# Altium PCB main_board.PcbDoc
Units mil, origin at the board's own origin, x right, y up, seen from the top; angles counter-clockwise.
Board outline 6000 x 4000 mil, 2 copper layers (Top Layer, Bottom Layer); 19 components, 43 nets, 145 pads, 0 vias.
Unrouted connection lines stored in the file: 58.
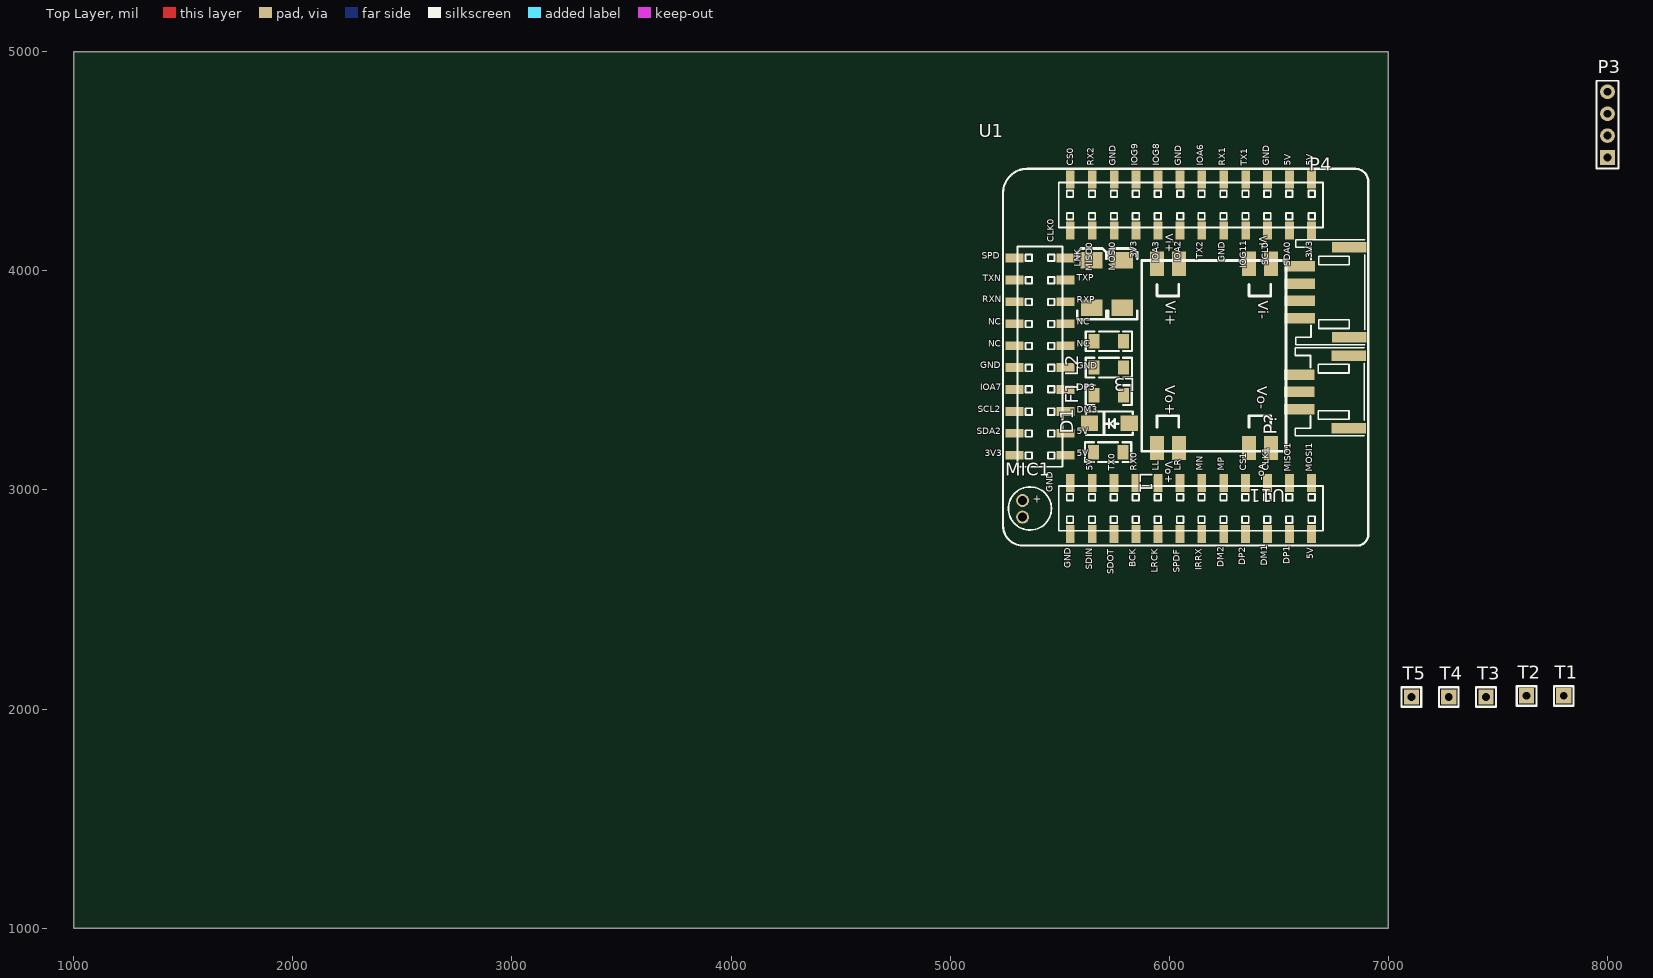
[diagram p0: Top Layer view]
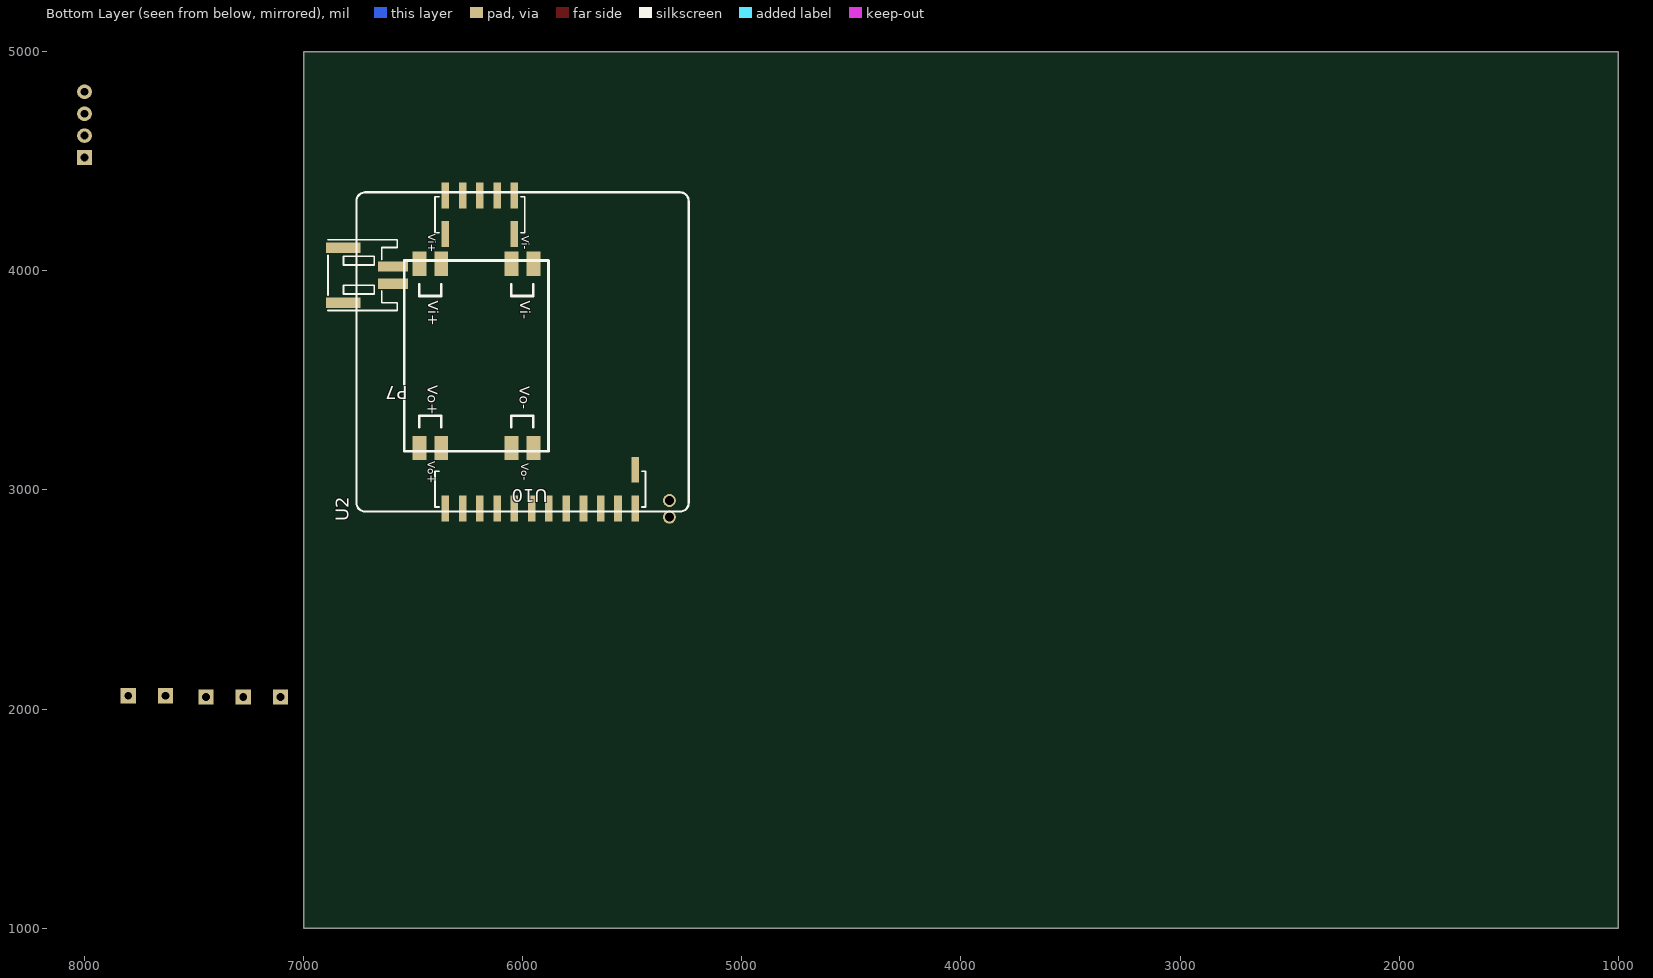
[diagram p1: Bottom Layer view, seen from below]

## Layer stack, top to bottom
Top Solder: solder mask 0.4, Solder Resist, Dk 3.5
Top Layer: signal copper 1.4
Dielectric 1: dielectric 12.6, FR-4, Dk 4.8
Bottom Layer: signal copper 1.4
Bottom Solder: solder mask 0.4, Solder Resist, Dk 3.5

## Board outline
1000,1000 7000,1000 7000,5000 1000,5000

## Design rules (kind name [scope] priority, off if disabled: settings)
Clearance [All] p1: gap=10
PolygonConnect [All] p1: connectstyle=Relief reliefconductorwidth=10 reliefentries=4 polygonreliefangle="90 Angle" airgapwidth=10
RoutingVias [All] p1: holewidth=28 width=50 viastyle="Through Hole" minholewidth=28 minwidth=50 maxholewidth=28 maxwidth=50
SolderMaskExpansion [All] p1: expansion=4
Width [All] p1: maxlimit=10 minlimit=10 preferedwidth=10
30 further rules are at their usual default settings.

## Classes and differential pairs
component class devices: L2 L3 MIC1 P3 P4 P7 P? T1 T2 T3 T4 T5 U10 U11
component class core: D1 F1 L1 U1 U2

## Components (designator, comment, footprint, x,y, rotation, side; value= is the part's Value field where it differs from the comment)
D1 "SS14" SMA/DO-214AC 5810,3305 r180 top
F1 "保险丝" FUSE-1206 5790,3430 r180 top
L1 "10uH" 1206L 5655,3170 r0 top
L2 "磁珠" 1206L 5790,3560 r180 top
L3 "磁珠" 1206L 5790,3680 r180 top
MIC1 "MIC" MIC 5365,2915 r0 top
P3 "Debug" "Header 4(排母)" 8000,4515 r90 top
P4 "USB1" PH2.0WS-4P 6750,3895 r90 top
P7 "电力接口" PH2.0WS-2P 6735,3980 r270 bottom
P? "3PIN" PH2.0WS-3P 6730,3450 r90 top
T1 "24V" "HEADER 1" 7805,2060 r0 top
T2 "12V" "HEADER 1" 7635,2060 r0 top
T3 "5V" "HEADER 1" 7450,2055 r0 top
T4 "3.3V" "HEADER 1" 7280,2055 r0 top
T5 "GND" "HEADER 1" 7110,2055 r0 top
U1 "NanoPi NEO Core" "NanoPi NEO Core" 5905,4595 r90 top locked
U2 "电力载波模块" 电力载波模块6410(贴片版) 6030,3645 r90 bottom
U10 "MP1584模块" MP1584电源模块 6050,3975 r270 bottom
U11 "MP1584模块" MP1584电源模块 6365,3975 r270 top

## Footprints (in the part's own frame and the unit in brackets; to place one, negate y for a bottom-side part, rotate by r counter-clockwise, add the part's x,y. Pads: shape width x height; smd on the part's side, far side on the other; paste and mask are expansions set on the pad)
1206L [mil]
  rect 50x65 smd: 1(-1.59,1.89) 2(133.41,1.89)
  silkscreen extent -39,-43 171,47, body extent 3,-28 129,35, height 35
FUSE-1206 [mil]
  rect 50x65 smd: 1(-1,-2) 2(134,-2)
  silkscreen extent -39,-47 172,43, body extent 1,-36 127,28, height 34
"HEADER 1" [mil]
  rect 70x70 hole 35: 1(-5,0)
  silkscreen extent -50,-45 40,44
"Header 4(排母)" [mm]
  rect 1.7x1.7 hole 0.9: 1(0.035,0.015)
  round 1.7 hole 0.9: 2(2.575,0.015) 3(5.115,0.015) 4(7.655,0.015)
  silkscreen extent -1.23,-1.25 8.93,1.29, body extent -1.23,-1.25 8.93,1.29, height 8.5
MIC [mm]
  round 1.5 hole 1.016: 1(-0.875,0.925) 2(-0.875,-1)
  silkscreen extent -2.52,-2.5 2.47,2.5, body extent -3.1,-2.97 2.9,3.02, height 2.21
MP1584电源模块 [mm]
  rect 2.8x1.6 smd: 1(-1.441,-0.032) 1(-1.441,2.519) 2(-1.441,-10.7) 2(-1.441,-8.16) 3(19.901,-10.7) 3(19.901,-8.16) 4(19.901,-0.032) 4(19.901,2.508)
  silkscreen extent -1.82,-12.45 20.28,4.26, body extent -1.97,-12.42 20.3,4.18, height 4.65
"NanoPi NEO Core" [mm]
  rect 2.1x1.02 smd: 1(-45.612,-18.878) 2(-39.712,-18.878) 3(-45.612,-16.338) 4(-39.712,-16.338) 5(-45.612,-13.798) 6(-39.712,-13.798) 7(-45.612,-11.258) 8(-39.712,-11.258) 9(-45.612,-8.718) 10(-39.712,-8.718) 11(-45.612,-6.178) 12(-39.712,-6.178) 13(-45.612,-3.638) 14(-39.712,-3.638) 15(-45.612,-1.098) 16(-39.712,-1.098) 17(-45.612,1.442) 18(-39.712,1.442) 19(-45.612,3.982) 20(-39.712,3.982) 21(-45.612,6.522) 22(-39.712,6.522) 23(-45.612,9.062) 24(-39.712,9.062) 25(-10.45,-18.883) 26(-4.55,-18.883) 27(-10.45,-16.343) 28(-4.55,-16.343) 29(-10.45,-13.803) 30(-4.55,-13.803) 31(-10.45,-11.263) 32(-4.55,-11.263) 33(-10.45,-8.723) 34(-4.55,-8.723) 35(-10.45,-6.183) 36(-4.55,-6.183) 37(-10.45,-3.643) 38(-4.55,-3.643) 39(-10.45,-1.103) 40(-4.55,-1.103) 41(-10.45,1.437) 42(-4.55,1.437) 43(-10.45,3.977) 44(-4.55,3.977) 45(-10.45,6.517) 46(-4.55,6.517) 47(-10.45,9.057) 48(-4.55,9.057)
  rect 1.02x2.1 smd: 49(-13.641,9.625) 50(-13.641,15.525) 51(-16.181,9.625) 52(-16.181,15.525) 53(-18.721,9.625) 54(-18.721,15.525) 55(-21.261,9.625) 56(-21.261,15.525) 57(-23.801,9.625) 58(-23.801,15.525) 59(-26.341,9.625) 60(-26.341,15.525) 61(-28.881,9.625) 62(-28.881,15.525) 63(-31.421,9.625) 64(-31.421,15.525) 65(-33.961,9.625) 66(-33.961,15.525) 67(-36.501,9.625) 68(-36.501,15.525)
  silkscreen extent -46.97,-25.48 -3.3,16.85, body extent -45.96,-20.21 -4.4,15.67, height 5.15
PH2.0WS-2P [mm]
  rect 1.2x4 smd: 0(-3.189,-2.112) 0(3.211,-2.112)
  rect 1.2x3.5 smd: 1(-0.989,3.638) 2(1.011,3.638)
  silkscreen extent -4.09,-3.88 4.11,4.12, body extent -3.97,-3.47 4.03,4.33, height 6.15
PH2.0WS-3P [mm]
  rect 1.2x4 smd: 0(-4.271,-2.279) 0(4.129,-2.279)
  rect 1.2x3.5 smd: 1(-2.071,3.471) 2(-0.071,3.471) 3(1.929,3.471)
  silkscreen extent -5.17,-4.05 5.02,3.95, body extent -5.17,-3.51 4.83,4.29, height 6.15
PH2.0WS-4P [mm]
  rect 1.2x4 smd: 0(-5.033,-1.822) 0(5.367,-1.822)
  rect 1.2x3.5 smd: 1(-2.833,3.928) 2(-0.833,3.928) 3(1.167,3.928) 4(3.167,3.928)
  silkscreen extent -5.93,-3.59 6.26,4.41, body extent -5.91,-3.06 6.09,4.74, height 6.15
SMA/DO-214AC [mm]
  rect 2x1.75 smd: 1(-0.178,0.025) 2(4.422,0.025)
  silkscreen extent -0.58,-1.32 4.82,1.38, body extent -0.38,-1.32 4.73,1.35, height 2.12
电力载波模块6410(贴片版) [mm]
  rect 3x0.89 smd: 0(-14.05,-13.8) 0(13.25,0.2) 0(13.25,8.2) 0(17.75,2.2) 1(-18.55,8.2) 2(-18.55,6.2) 3(-18.55,4.2) 4(-18.55,2.2) 5(-18.55,0.2) 6(-18.55,-1.8) 7(-18.55,-3.8) 8(-18.55,-5.8) 9(-18.55,-7.8) 10(-18.55,-9.8) 11(-18.55,-11.8) 12(-18.55,-13.8) 13(17.75,0.2) 14(17.75,4.2) 15(17.75,6.2) 16(17.75,8.2)
  rect 0x0 smd: 0(-14.05,8.2)
  silkscreen extent -18.9,-20 18.1,18.5, body extent -19.4,-14.8 18.6,9.2, height 6.7

## Part data
D1: library part Diode, "二极管"
F1: library part Fuse
L1 L2 L3: library part L, "电感"
P3: library part "Header 4", "排针"
P4: library part USB
P7: library part 电源端子
P?: library part 接线端子-3PIN
T1 T2 T3 T4 T5: library part 测试点, "测试点"
U2: library part 电力载波模块6410
U10 U11: library part MP1584电源模块

## Free pads (board coordinates)
  rect 98.43x75 smd: 1(5645.08,4048.31) 1(5785.08,4048.31) 2(5646.08,3831.57) 2(5786.08,3831.57)

## Nets (pads, with @x,y where several pads share a name; then routed paths per layer and width w, separated by ;. In a path a pad name is that pad's centre, name@x,y a point inside that pad or via, vN(x,y) a via of type N, cw(c..) or ccw(c..) an arc to the next point about the centre after c; other vN are vias at no path point)
DGND: L2.1 P3.4 P4.4 U1.23 U1.24 U1.30 U1.33 U1.59 U1.60 U2.1 U2.12
EPHY_RX_N: U1.54 U2.10
EPHY_RX_P: U1.53 U2.9
EPHY_TX_N: U1.52 U2.8
EPHY_TX_P: U1.51 U2.7
GND: L2.2 L3.2 P7.2 T5.1 U2.16
LINK_LED: U1.49
NetD1_1: D1.1 F1.2
NetD1_2: D1.2 L1.1
NetMIC1_1: MIC1.1 U1.10
NetMIC1_2: MIC1.2 U1.12
NetP3_2: P3.2 U1.18
NetP3_3: P3.3 U1.20
NetP4_2: P4.2 U1.5
NetP4_3: P4.3 U1.3
NetT1_1: T1.1
NetU1_2: U1.2
NetU1_4: U1.4
NetU1_6: U1.6
NetU1_7: U1.7
NetU1_8: U1.8
NetU1_9: U1.9
NetU1_15: U1.15
NetU1_17: U1.17
NetU1_27: U1.27
NetU1_29: U1.29
NetU1_31: U1.31
NetU1_35: U1.35
NetU1_43: U1.43
NetU1_45: U1.45
NetU1_46: U1.46
NetU1_47: U1.47
NetU1_48: U1.48
NetU1_62: U1.62
NetU1_64: U1.64
NetU1_66: U1.66
PGND: L3.1 P?.3 U10.1 U10.4 U11.1 U11.4
PLC_12V: L1.2 U2.11
SPD_LED: U1.50
VDD_3.3V: T4.1 U1.25 U1.41 U1.68
VDD_5.0V: P3.1 P4.1 T3.1 U1.1 U1.22 U1.26 U1.28 U1.65 U1.67 U11.3
VDD_12.0V: F1.1 T2.1 U10.3
VDD_24.0V: P7.1 P?.2 U2.13 U10.2 U11.2
pads on no net: P4.0 P7.0 P?.0 P?.1 U1.11 U1.13 U1.14 U1.16 U1.19 U1.21 U1.32 U1.34 U1.36 U1.37 U1.38 U1.39 U1.40 U1.42 U1.44 U1.55 U1.56 U1.57 U1.58 U1.61 U1.63 U2.0 U2.2 U2.3 U2.4 U2.5 U2.6 U2.14 U2.15

## Silkscreen, mask and mechanical layers (free items; w line width, h text height)
Top Overlay:
  lines w12: 5580.08,3817.31 5580.08,3778.31 5713.08,3778.31 5713.08,3817.31 ; 5580.08,4054.31 5580.08,4084.31 5597.08,4101.31 5695.08,4101.31 5713.08,4083.31 5713.08,4054.31 ; 5720.08,3817.31 5720.08,3778.31 5853.08,3778.31 5853.08,3817.31 ; 5720.08,4054.31 5720.08,4084.31 5737.08,4101.31 5835.08,4101.31 5853.08,4083.31 5853.08,4054.31

## Text inside footprints (layer, text, board x,y; h text height)
MIC1: Top Overlay "+" at 5375.83,2930.75 h60
U1: Top Overlay "MP" at 6262.84,3087.13 h50 r90; Top Overlay "MN" at 6162.84,3087.13 h50 r90; Top Overlay "LR" at 6062.84,3087.13 h50 r90; Top Overlay "LL" at 5962.84,3087.13 h50 r90; Top Overlay "GND" at 5479.8,2989.68 h50 r90; Top Overlay "5V" at 5662.84,3087.13 h50 r90; Top Overlay "TX0" at 5762.84,3087.13 h50 r90; Top Overlay "RX0" at 5862.84,3087.13 h50 r90; Top Overlay "CS0" at 5573.17,4479.19 h50 r90; Top Overlay "CLK0" at 5484.72,4130.43 h50 r90; Top Overlay "RX2" at 5666.47,4479.19 h50 r90; Top Overlay "MISO0" at 5659.92,3996.57 h50 r90; Top Overlay "MOSI0" at 5763.83,3999.17 h50 r90; Top Overlay "GND" at 5766.47,4479.19 h50 r90; Top Overlay "IOG9" at 5866.47,4479.19 h50 r90; Top Overlay "IOG8" at 5966.47,4479.19 h50 r90; Top Overlay "GND" at 6066.47,4479.19 h50 r90; Top Overlay "IOA6" at 6166.47,4479.19 h50 r90; Top Overlay "3V3" at 5863.83,4057.2 h50 r90; Top Overlay "IOA3" at 5963.83,4037.15 h50 r90; Top Overlay "IOA2" at 6063.83,4037.47 h50 r90; Top Overlay "TX2" at 6163.83,4054.24 h50 r90; Top Overlay "GND" at 6263.83,4038.26 h50 r90; Top Overlay "RX1" at 6266.47,4479.19 h50 r90; Top Overlay "TX1" at 6366.47,4479.19 h50 r90; Top Overlay "GND" at 6466.47,4479.19 h50 r90; Top Overlay "SCL0" at 6463.83,4025.18 h50 r90; Top Overlay "5V" at 6566.47,4479.19 h50 r90; Top Overlay "SDA0" at 6563.83,4020.24 h50 r90; Top Overlay "3V3" at 6663.83,4057.2 h50 r90; Top Overlay "SPD" at 5145.18,4042.25 h50; Top Overlay "LNK" at 5606.77,4018.23 h50 r90; Top Overlay "TXN" at 5148,3941.06 h50; Top Overlay "TXP" at 5577.6,3941.77 h50; Top Overlay "RXN" at 5145.51,3844.06 h50; Top Overlay "RXP" at 5577.6,3842.47 h50; Top Overlay "NC" at 5173.32,3742.33 h50; Top Overlay "NC" at 5577.6,3742.13 h50; Top Overlay "GND" at 5138.11,3543.26 h50; Top Overlay "GND" at 5577.6,3541.68 h50; Top Overlay "IOA7" at 5137,3442.06 h50; Top Overlay "DP3" at 5577.6,3442.56 h50; Top Overlay "SCL2" at 5125.27,3342.06 h50; Top Overlay "DM3" at 5577.6,3341.54 h50; Top Overlay "SDA2" at 5120.33,3242.06 h50; Top Overlay "5V" at 5577.6,3242.77 h50; Top Overlay "3V3" at 5157.06,3143.06 h50; Top Overlay "5V" at 5577.6,3141.89 h50; Top Overlay "NC" at 5173.32,3641.54 h50; Top Overlay "NC" at 5577.6,3641.15 h50; Top Overlay "GND" at 5562.11,2641.94 h50 r90; Top Overlay "SDIN" at 5658.91,2635.43 h50 r90; Top Overlay "SDOT" at 5758.91,2615.33 h50 r90; Top Overlay "BCK" at 5858.91,2647.99 h50 r90; Top Overlay "LRCK" at 5958.91,2620.69 h50 r90; Top Overlay "SPDF" at 6058.91,2621.38 h50 r90; Top Overlay "IRRX" at 6158.91,2634.23 h50 r90; Top Overlay "DM2" at 6258.91,2647.95 h50 r90; Top Overlay "DP2" at 6358.91,2655.39 h50 r90; Top Overlay "DM1" at 6458.91,2653.82 h50 r90; Top Overlay "DP1" at 6560.31,2661.25 h50 r90; Top Overlay "5V" at 6668.78,2684.03 h50 r90; Top Overlay "MOSI1" at 6664.42,3083.19 h50 r90; Top Overlay "MISO1" at 6566.42,3083.19 h50 r90; Top Overlay "CLK1" at 6464.25,3087.13 h50 r90; Top Overlay "CS1" at 6362.84,3087.13 h50 r90; Top Overlay "5V" at 6666.47,4479.19 h50 r90; Top Overlay "IOG11" at 6362.68,4010.35 h50 r90
U10: Bottom Overlay "Vi-" at 6016.54,4160.04 h59.06 r90; Bottom Overlay "Vi+" at 6442.72,4168.9 h59.06 r90; Bottom Overlay "Vo-" at 6018.29,3120.95 h59.06 r90; Bottom Overlay "Vo+" at 6444.68,3129.53 h59.06 r90; Bottom Overlay "Vo+" at 6449.1,3478.24 h78.74 r90; Bottom Overlay "Vo-" at 6030.1,3473.32 h78.74 r90; Bottom Overlay "Vi+" at 6446.1,3862.32 h78.74 r90; Bottom Overlay "Vi-" at 6026.1,3862.32 h78.74 r90
U11: Top Overlay "Vi-" at 6398.46,4160.04 h59.06 r270; Top Overlay "Vi+" at 5972.28,4168.9 h59.06 r270; Top Overlay "Vo-" at 6396.71,3120.95 h59.06 r270; Top Overlay "Vo+" at 5970.32,3129.53 h59.06 r270; Top Overlay "Vo+" at 5965.9,3478.24 h78.74 r270; Top Overlay "Vo-" at 6384.9,3473.32 h78.74 r270; Top Overlay "Vi+" at 5968.9,3862.32 h78.74 r270; Top Overlay "Vi-" at 6388.9,3862.32 h78.74 r270